# Altium PCB nose_thermo.PcbDoc
Units mil, origin at the board's own origin, x right, y up, seen from the top; angles counter-clockwise.
Board outline 349.57 x 642.49 mil, 2 copper layers (Layer 1 (Top Layer), Layer 4 (Bottom Layer)); 2 components, 4 nets, 8 pads, 4 vias.
Unrouted connection lines stored in the file: 1.
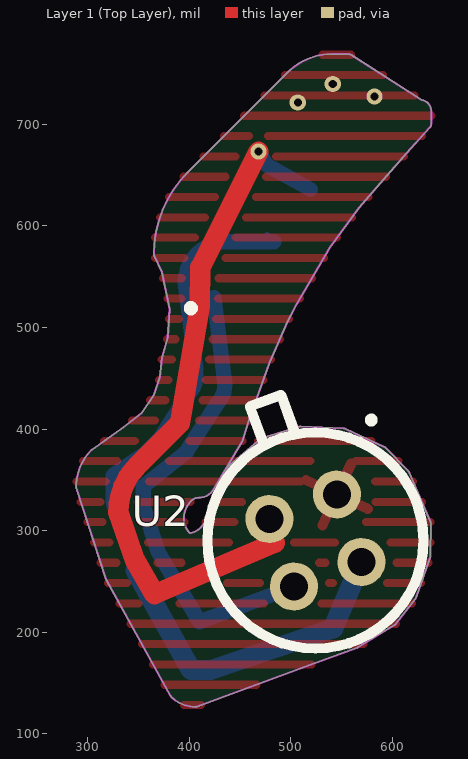
[diagram p0: Layer 1 (Top Layer) view]
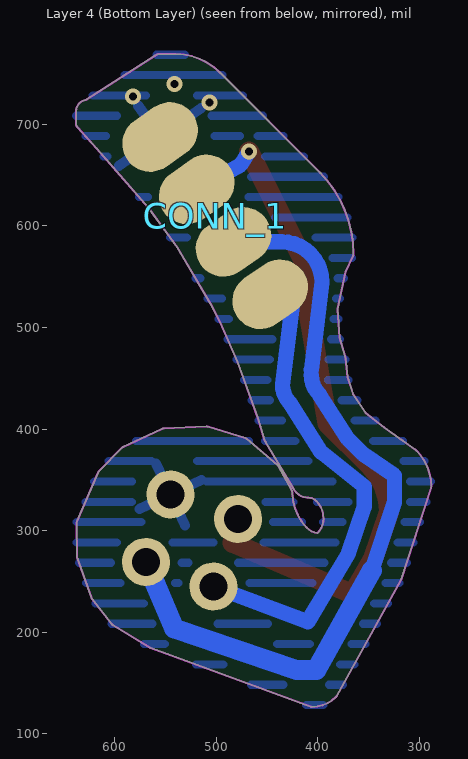
[diagram p1: Layer 4 (Bottom Layer) view, seen from below]

## Layer stack, top to bottom
Top Solder: solder mask 0.4, Solder Resist, Dk 3.5
Layer 1 (Top Layer): signal copper 0.7087
Dielectric 1: dielectric 12.6, FR-4, Dk 4.8
Layer 4 (Bottom Layer): signal copper 0.7087
Bottom Solder: solder mask 0.4, Solder Resist, Dk 3.5

## Board outline
318.28,251.43 cw(c322.66,253.88) 317.89,252.32 317.88,252.34 288.75,341.71 288.75,341.72 288.75,341.71 cw(c293.52,343.28) 288.5,343.28 cw(c338.91,343.28) 303.27,378.92 cw(c306.81,375.38) 303.28,378.94 303.27,378.92 303.5,379.16 cw(c307.05,375.61) 304.15,379.7 316.54,388.57 cw(c319.47,384.5) 316.55,388.58 335.13,401.86 353.03,415.8 365.3,434.18 370.92,451.17 372.92,469.75 cw(c377.9,469.21) 373.09,470.61 373.09,470.62 378.71,489.99 380.64,518.12 372.92,554.61 365.58,570.22 cw(c370.12,572.36) 365.1,572.36 cw(c478.71,572.36) 398.38,652.69 496.79,751.1 cw(c540.03,707.86) 540.03,769.02 556.62,769.02 cw(c556.62,764) 559.33,768.23 628.49,723.99 cw(c626.83,712.86) 638.07,712.86 638.07,700.22 cw(c633.06,700.22) 636.74,696.82 636.76,696.84 636.74,696.82 617.63,675.94 617.67,675.98 617.63,675.94 617.59,675.89 617.63,675.94 594.8,649.75 566.94,617.77 538.45,578.83 505.94,523.43 496.43,505.25 479.01,465.5 458.95,410.11 452.43,388.74 452.42,388.72 452.43,388.74 cw(c447.62,390.18) 451.92,387.6 424.21,341.42 cw(c409.36,349.2) 409.36,332.43 ccw(c409.36,321.72) 401.8,329.31 ccw(c409.36,321.72) 401.78,329.3 ccw(c398.23,332.84) 401.8,329.31 401.78,329.3 ccw(c419.18,311.9) 394.57,311.9 ccw(c414.91,311.9) 400.57,297.48 ccw(c397.3,316.48) 410.93,302.85 ccw(c376.69,337.09) 410.95,302.87 ccw(c376.69,337.09) 425.12,337.09 cw(c430.13,337.09) 425.75,339.53 439.02,363.54 cw(c443.41,361.12) 440.17,364.95 440.18,364.96 470.13,390.34 cw(c473.39,386.53) 471.93,391.33 508.12,402.29 cw(c509.57,397.49) 509.79,402.5 551.76,400.68 cw(c551.55,395.67) 553.67,400.21 553.66,400.21 cw(c551.55,395.67) 553.67,400.21 591.74,382.47 591.75,382.47 ccw(c589.63,377.93) 591.74,382.47 cw(c589.63,377.93) 593.21,381.43 615.4,358.74 cw(c611.81,355.24) 616.42,357.22 637.24,308.84 cw(c632.63,306.86) 637.65,306.86 cw(c632.63,306.86) 637.65,306.8 637.29,275.08 ccw(c632.28,275.14) 637.29,275.14 637.29,275.08 cw(c632.28,275.14) 637,273.46 623.07,234.03 cw(c618.34,235.7) 622.28,232.6 622.29,232.61 cw(c618.34,235.7) 622.28,232.6 602.93,207.98 cw(c598.99,211.07) 602.92,207.97 602.93,207.98 cw(c598.99,211.07) 601.59,206.79 ccw(c598.99,211.07) 601.59,206.79 ccw(c598.99,211.07) 602.92,207.97 601.59,206.79 565.67,184.98 565.67,184.97 ccw(c563.07,189.26) 565.67,184.98 cw(c563.07,189.26) 564.78,184.55 518.92,167.89 518.93,167.89 518.92,167.89 518.91,167.89 518.92,167.89 407.44,126.83 cw(c405.71,131.54) 405.71,126.53 cw(c405.71,159.61) 382.31,136.22 cw(c385.86,139.76) 381.46,137.35

## Design rules (kind name [scope] priority, off if disabled: settings)
Clearance [All] p1: gap=4 ignorepadtopadclearanceinfootprint=FALSE except(0: Arc-Hole Track-Hole SMDPad-Hole THPad-Hole Via-Hole Fill-Hole Poly-Hole Region-Hole Text-Hole)
DiffPairsRouting [All] p1: maxlimit=10 minlimit=10 mostfreqgap=10 toplayer_minwidth=15 toplayer_maxwidth=15 toplayer_prefwidth=15 bottomlayer_minwidth=15 bottomlayer_maxwidth=15 bottomlayer_prefwidth=15 substack1={A9119681-F30E-4965-AEFB-5FD7E99CBF57} toplayer_{a9119681-f30e-4965-aefb-5fd7e99cbf57}_minwidth=15 toplayer_{a9119681-f30e-4965-aefb-5fd7e99cbf57}_maxwidth=15 toplayer_{a9119681-f30e-4965-aefb-5fd7e99cbf57}_prefwidth=15 bottomlayer_{a9119681-f30e-4965-aefb-5fd7e99cbf57}_minwidth=15 bottomlayer_{a9119681-f30e-4965-aefb-5fd7e99cbf57}_maxwidth=15 bottomlayer_{a9119681-f30e-4965-aefb-5fd7e99cbf57}_prefwidth=15 substack2={F6C10761-EC22-4305-87DD-0F5299EFC78A} toplayer_{f6c10761-ec22-4305-87dd-0f5299efc78a}_minwidth=15 toplayer_{f6c10761-ec22-4305-87dd-0f5299efc78a}_maxwidth=15 toplayer_{f6c10761-ec22-4305-87dd-0f5299efc78a}_prefwidth=15 bottomlayer_{f6c10761-ec22-4305-87dd-0f5299efc78a}_minwidth=15 bottomlayer_{f6c10761-ec22-4305-87dd-0f5299efc78a}_maxwidth=15 bottomlayer_{f6c10761-ec22-4305-87dd-0f5299efc78a}_prefwidth=15 maxuncoupledlength=500
PlaneClearance [All] p1: clearance=8
PlaneConnect GND [InNet('GND')] p1: planeconnectstyle=Direct reliefexpansion=20 reliefentries=4 reliefconductorwidth=10 reliefairgap=10
PlaneConnect [All] p2: planeconnectstyle=Direct reliefexpansion=20 reliefentries=4 reliefconductorwidth=10 reliefairgap=10
PolygonConnect GND_1 [InNet('GND')] p1: thpad.connectstyle=Relief thpad.reliefconductorwidth=10 thpad.reliefentries=4 thpad.polygonreliefangle="90 Angle" thpad.airgapwidth=10 smdpad.connectstyle=Relief smdpad.reliefconductorwidth=10 smdpad.reliefentries=4 smdpad.polygonreliefangle="90 Angle" smdpad.airgapwidth=10 via.connectstyle=Direct via.reliefconductorwidth=10 via.reliefentries=4 via.polygonreliefangle="90 Angle" via.airgapwidth=10
PolygonConnect [All] p2: connectstyle=Relief reliefconductorwidth=10 reliefentries=4 polygonreliefangle="90 Angle" airgapwidth=10
RoomDefinition nose_thermo [InComponentClass('nose_thermo')] p1: confinementstyle=ConfineIn formatcopy=TRUE lockcomponents=FALSE outline -3944.1,-5931.64 -1944.1,-5931.64 -1944.1,-4931.64 -3944.1,-4931.64
RoutingCorners [All] p1: cornerstyle=Round minsetback=100 maxsetback=100
RoutingVias [All] p1: holewidth=8 width=16 viastyle="Through Hole" minholewidth=4 minwidth=8 maxholewidth=12 maxwidth=24
SolderMaskExpansion [All] p1: expansion=4 istentingtop=FALSE
Width POWER [InNet('3.3V') or InNet('5V') or InNet('BATTERY_1') or InNet('VBAT')] p1: maxlimit=30 minlimit=4 preferedwidth=8 substack1={A9119681-F30E-4965-AEFB-5FD7E99CBF57} substack2={F6C10761-EC22-4305-87DD-0F5299EFC78A} minimp=50.000000 maximp=50.000000 favimp=50.000000
Width [All] p2: maxlimit=10 minlimit=4 preferedwidth=6 substack1={A9119681-F30E-4965-AEFB-5FD7E99CBF57} substack2={F6C10761-EC22-4305-87DD-0F5299EFC78A} minimp=50.000000 maximp=50.000000 favimp=50.000000
26 further rules are at their usual default settings.

## Components (designator, comment, footprint, x,y, rotation, side; value= is the part's Value field where it differs from the comment)
CONN_1 "THERMO" 4_POS_1MM_HEADER 501.25,610.02 r55 top
U2 "ZTP-135SR" ZTP-135SR 524.02,290.32 r335 top

## Footprints (in the part's own frame and the unit in brackets; to place one, negate y for a bottom-side part, rotate by r counter-clockwise, add the part's x,y. Pads: shape width x height; smd on the part's side, far side on the other; paste and mask are expansions set on the pad)
4_POS_1MM_HEADER [mm]
  oval 1.4x2 smd far side: 1(-2.4,0) 2(-0.8,0) 3(0.8,0) 4(2.4,0)
  silkscreen extent -3.4,0.7 -3.3,0.8
ZTP-135SR [mm]
  round 1.2 hole 0.7: 1(0,1.27) 2(1.27,0) 3(0,-1.27) 4(-1.27,0)
  silkscreen extent -2.9,-2.7 2.7,3.35, body extent -3.24,-2.79 2.74,3.19, height 2.67

## Part data
CONN_1: library part 4_pin_1mm_header
U2: "Undefined or Miscellaneous", Manufacturer_Name="Amphenol Advanced Sensors", Mouser Part Number=527-ZTP-135SR, Allied_Number=70282698, Allied Price/Stock=https://www.alliedelec.com/amphenol-advanced-sensors-ztp-135sr/70282698/, Datasheet Link=https://www.amphenol-sensors.com/en/component/edocman/370-thermopile-ir-sensor-applications/download?Itemid=7967, Manufacturer_Part_Number=ZTP-135SR, Mouser Price/Stock=https://www.mouser.com/Search/Refine.aspx?Keyword=527-ZTP-135SR

## Via types
v1: diameter 16, hole 8, Layer 1 (Top Layer) to Layer 4 (Bottom Layer), tented both sides, 4 vias

## Nets (pads, with @x,y where several pads share a name; then routed paths per layer and width w, separated by ;. In a path a pad name is that pad's centre, name@x,y a point inside that pad or via, vN(x,y) a via of type N, cw(c..) or ccw(c..) an arc to the next point about the centre after c; other vN are vias at no path point)
GND: CONN_1.4 U2.1
  other v1: 506.75,721.36 582.15,727.21 541.15,739.66
TP_NOSE: CONN_1.3 U2.4 | length 712.8
  Layer 1 (Top Layer) w6: U2.4 484.2,288.2
  Layer 1 (Top Layer) w15: 386.97,402.14 ccw(c374.44,414.67) 391.17,408.84 ccw(c374.44,414.67) 392.16,414.67
  Layer 1 (Top Layer) w20: v1(467.95,673.04) 410.79,559.22 410.23,521.39 392.16,414.67 391.17,408.84 390.67,405.84 349.22,364.39 ccw(c395.48,318.12) 330.05,318.12 346.43,270.69 365.62,237.38 484.2,288.2
  Layer 4 (Bottom Layer) w15: v1(467.95,673.04) 475.77,660.24 CONN_1.3
TP_NOSE_GND: CONN_1.2 U2.2 | length 787.7
  Layer 4 (Bottom Layer) w6: 363.91,384.1 ccw(c363.91,385.65) 365,384.56 ; 406.53,452.83 406.53,458.44 ; CONN_1.2@476.41,590.99 CONN_1.2 ; U2.2@554.75,269.18 U2.2
  Layer 4 (Bottom Layer) w15: 347.08,260.83 324.82,327.4 324.82,354.22 355.8,375.35 370.53,390.08 398.87,434.33 ccw(c380.37,452.83) 406.53,452.83 ; 406.53,458.44 395.96,544.44 cw(c435.74,544.44) 435.74,584.21 CONN_1.2 ; 427.21,425.06 ccw(c408.71,443.56) 428.23,426.14 428.5,426.57
  Layer 4 (Bottom Layer) w20: 347.08,260.83 401.73,162.89 421.07,162.89 541.45,203.74 U2.2
TP_THERMISTOR: CONN_1.1 U2.3 | length 463.6
  Layer 4 (Bottom Layer) w15: CONN_1.1@424.3,529.56 434.87,443.56 cw(c408.71,443.56) 428.23,426.14 396.85,377.15 354.57,343.23 354.57,323.62 370.01,277.45 410.04,210.33 U2.3
copper on no net: | length 1.6
  Layer 4 (Bottom Layer) w6: -2451.26,365.58 cw(c-2452.71,364.12) -2450.65,364.12

## Polygon pours and split planes (outlines as drawn)
GND on Layer 4 (Bottom Layer) "Layer 1 (Top Layer)-No Net" (hatched Horizontal grid 20 track 8, pour order 20): 318.28,251.43 cw(c322.66,253.88) 317.89,252.32 317.88,252.34 288.75,341.71 288.75,341.72 288.75,341.71 cw(c293.52,343.28) 288.5,343.28 cw(c338.91,343.28) 303.27,378.92 cw(c306.81,375.38) 303.28,378.94 303.27,378.92 303.5,379.16 cw(c307.05,375.61) 304.15,379.7 316.54,388.57 cw(c319.47,384.5) 316.55,388.58 335.13,401.86 353.03,415.8 365.3,434.18 370.92,451.17 372.92,469.75 cw(c377.9,469.21) 373.09,470.61 373.09,470.62 378.71,489.99 380.64,518.12 372.92,554.61 365.58,570.22 cw(c370.12,572.36) 365.1,572.36 cw(c478.71,572.36) 398.38,652.69 496.79,751.1 cw(c540.03,707.86) 540.03,769.02 556.62,769.02 cw(c556.62,764) 559.33,768.23 628.49,723.99 cw(c626.83,712.86) 638.07,712.86 638.07,700.22 cw(c633.06,700.22) 636.74,696.82 636.76,696.84 636.74,696.82 617.63,675.94 617.67,675.98 617.63,675.94 617.59,675.89 617.63,675.94 594.8,649.75 566.94,617.77 538.45,578.83 505.94,523.43 496.43,505.25 479.01,465.5 458.95,410.11 452.43,388.74 452.42,388.72 452.43,388.74 cw(c447.62,390.18) 451.92,387.6 424.21,341.42 cw(c409.36,349.2) 409.36,332.43 ccw(c409.36,321.72) 401.8,329.31 ccw(c409.36,321.72) 401.78,329.3 ccw(c398.23,332.84) 401.8,329.31 401.78,329.3 ccw(c419.18,311.9) 394.57,311.9 ccw(c414.91,311.9) 400.57,297.48 ccw(c397.3,316.48) 410.93,302.85 ccw(c376.69,337.09) 410.95,302.87 ccw(c376.69,337.09) 425.12,337.09 cw(c430.13,337.09) 425.75,339.53 439.02,363.54 cw(c443.41,361.12) 440.17,364.95 440.18,364.96 470.13,390.34 cw(c473.39,386.53) 471.93,391.33 508.12,402.29 cw(c509.57,397.49) 509.79,402.5 551.76,400.68 cw(c551.55,395.67) 553.67,400.21 553.66,400.21 cw(c551.55,395.67) 553.67,400.21 591.74,382.47 591.75,382.47 ccw(c589.63,377.93) 591.74,382.47 cw(c589.63,377.93) 593.21,381.43 615.4,358.74 cw(c611.81,355.24) 616.42,357.22 637.24,308.84 cw(c632.63,306.86) 637.65,306.86 cw(c632.63,306.86) 637.65,306.8 637.29,275.08 ccw(c632.28,275.14) 637.29,275.14 637.29,275.08 cw(c632.28,275.14) 637,273.46 623.07,234.03 cw(c618.34,235.7) 622.28,232.6 622.29,232.61 cw(c618.34,235.7) 622.28,232.6 602.93,207.98 cw(c598.99,211.07) 602.92,207.97 602.93,207.98 cw(c598.99,211.07) 601.59,206.79 ccw(c598.99,211.07) 601.59,206.79 ccw(c598.99,211.07) 602.92,207.97 601.59,206.79 565.67,184.98 565.67,184.97 ccw(c563.07,189.26) 565.67,184.98 cw(c563.07,189.26) 564.78,184.55 518.92,167.89 518.93,167.89 518.92,167.89 518.91,167.89 518.92,167.89 407.44,126.83 cw(c405.71,131.54) 405.71,126.53 cw(c405.71,159.61) 382.31,136.22 cw(c385.86,139.76) 381.46,137.35
GND on Layer 1 (Top Layer) "Layer 1 (Top Layer)-No Net1" (hatched Horizontal grid 20 track 8, pour order 21): 318.28,251.43 cw(c322.66,253.88) 317.89,252.32 317.88,252.34 288.75,341.71 288.75,341.72 288.75,341.71 cw(c293.52,343.28) 288.5,343.28 cw(c338.91,343.28) 303.27,378.92 cw(c306.81,375.38) 303.28,378.94 303.27,378.92 303.5,379.16 cw(c307.05,375.61) 304.15,379.7 316.54,388.57 cw(c319.47,384.5) 316.55,388.58 335.13,401.86 353.03,415.8 365.3,434.18 370.92,451.17 372.92,469.75 cw(c377.9,469.21) 373.09,470.61 373.09,470.62 378.71,489.99 380.64,518.12 372.92,554.61 365.58,570.22 cw(c370.12,572.36) 365.1,572.36 cw(c478.71,572.36) 398.38,652.69 496.79,751.1 cw(c540.03,707.86) 540.03,769.02 556.62,769.02 cw(c556.62,764) 559.33,768.23 628.49,723.99 cw(c626.83,712.86) 638.07,712.86 638.07,700.22 cw(c633.06,700.22) 636.74,696.82 636.76,696.84 636.74,696.82 617.63,675.94 617.67,675.98 617.63,675.94 617.59,675.89 617.63,675.94 594.8,649.75 566.94,617.77 538.45,578.83 505.94,523.43 496.43,505.25 479.01,465.5 458.95,410.11 452.43,388.74 452.42,388.72 452.43,388.74 cw(c447.62,390.18) 451.92,387.6 424.21,341.42 cw(c409.36,349.2) 409.36,332.43 ccw(c409.36,321.72) 401.8,329.31 ccw(c409.36,321.72) 401.78,329.3 ccw(c398.23,332.84) 401.8,329.31 401.78,329.3 ccw(c419.18,311.9) 394.57,311.9 ccw(c414.91,311.9) 400.57,297.48 ccw(c397.3,316.48) 410.93,302.85 ccw(c376.69,337.09) 410.95,302.87 ccw(c376.69,337.09) 425.12,337.09 cw(c430.13,337.09) 425.75,339.53 439.02,363.54 cw(c443.41,361.12) 440.17,364.95 440.18,364.96 470.13,390.34 cw(c473.39,386.53) 471.93,391.33 508.12,402.29 cw(c509.57,397.49) 509.79,402.5 551.76,400.68 cw(c551.55,395.67) 553.67,400.21 553.66,400.21 cw(c551.55,395.67) 553.67,400.21 591.74,382.47 591.75,382.47 ccw(c589.63,377.93) 591.74,382.47 cw(c589.63,377.93) 593.21,381.43 615.4,358.74 cw(c611.81,355.24) 616.42,357.22 637.24,308.84 cw(c632.63,306.86) 637.65,306.86 cw(c632.63,306.86) 637.65,306.8 637.29,275.08 ccw(c632.28,275.14) 637.29,275.14 637.29,275.08 cw(c632.28,275.14) 637,273.46 623.07,234.03 cw(c618.34,235.7) 622.28,232.6 622.29,232.61 cw(c618.34,235.7) 622.28,232.6 602.93,207.98 cw(c598.99,211.07) 602.92,207.97 602.93,207.98 cw(c598.99,211.07) 601.59,206.79 ccw(c598.99,211.07) 601.59,206.79 ccw(c598.99,211.07) 602.92,207.97 601.59,206.79 565.67,184.98 565.67,184.97 ccw(c563.07,189.26) 565.67,184.98 cw(c563.07,189.26) 564.78,184.55 518.92,167.89 518.93,167.89 518.92,167.89 518.91,167.89 518.92,167.89 407.44,126.83 cw(c405.71,131.54) 405.71,126.53 cw(c405.71,159.61) 382.31,136.22 cw(c385.86,139.76) 381.46,137.35

## Keep-outs
Keep-Out Layer:
  lines w2: 288.75,341.71 cw(c293.52,343.28) 288.5,343.28 cw(c338.91,343.28) 303.27,378.92 ; 288.75,341.72 288.75,341.71 ; 288.75,341.72 288.75,341.71 ; 288.75,341.71 317.88,252.34 317.89,252.32 ccw(c322.66,253.88) 318.28,251.43 381.46,137.35 ccw(c385.86,139.76) 382.31,136.22 ccw(c405.71,159.61) 405.71,126.53 ccw(c405.71,131.54) 407.44,126.83 518.92,167.89 ; 303.27,378.92 cw(c306.81,375.38) 303.28,378.94 303.27,378.92 ; 303.27,378.92 303.5,379.16 cw(c307.05,375.61) 304.15,379.7 316.54,388.57 ; 303.27,378.92 303.27,378.92 ; 316.55,388.58 ccw(c319.47,384.5) 316.54,388.57 ; 316.55,388.58 335.13,401.86 353.03,415.8 365.3,434.18 370.92,451.17 372.92,469.75 cw(c377.9,469.21) 373.09,470.61 ; 373.09,470.62 378.71,489.99 380.64,518.12 372.92,554.61 365.58,570.22 cw(c370.12,572.36) 365.1,572.36 cw(c478.71,572.36) 398.38,652.69 496.79,751.1 cw(c540.03,707.86) 540.03,769.02 556.62,769.02 cw(c556.62,764) 559.33,768.23 628.49,723.99 cw(c626.83,712.86) 638.07,712.86 638.07,700.22 cw(c633.06,700.22) 636.74,696.82 ; 373.09,470.61 373.09,470.62 ; 400.57,297.48 ccw(c397.3,316.48) 410.93,302.85 ; 400.57,297.48 cw(c414.91,311.9) 394.57,311.9 cw(c419.18,311.9) 401.78,329.3 ; 400.57,297.48 400.57,297.48 ; 401.78,329.3 ccw(c398.23,332.84) 401.8,329.31 ; 401.8,329.31 ccw(c409.36,321.72) 401.78,329.3 ; 401.8,329.31 cw(c409.36,321.72) 409.36,332.43 ccw(c409.36,349.2) 424.21,341.42 451.92,387.6 ccw(c447.62,390.18) 452.43,388.74 ; 401.78,329.3 401.8,329.31 ; 410.95,302.87 ccw(c376.69,337.09) 425.12,337.09 cw(c430.13,337.09) 425.75,339.53 439.02,363.54 cw(c443.41,361.12) 440.17,364.95 440.18,364.96 470.13,390.34 cw(c473.39,386.53) 471.93,391.33 508.12,402.29 cw(c509.57,397.49) 509.79,402.5 551.76,400.68 cw(c551.55,395.67) 553.67,400.21 ; 410.93,302.85 ccw(c376.69,337.09) 410.95,302.87 ; 452.43,388.74 452.42,388.72 452.43,388.74 ; 452.43,388.74 458.95,410.11 479.01,465.5 496.43,505.25 505.94,523.43 538.45,578.83 566.94,617.77 594.8,649.75 617.63,675.94 ; 518.92,167.89 518.91,167.89 518.92,167.89 ; 518.92,167.89 518.93,167.89 ; 518.92,167.89 518.93,167.89 ; 518.92,167.89 564.78,184.55 ccw(c563.07,189.26) 565.67,184.98 ; 553.67,400.21 ccw(c551.55,395.67) 553.66,400.21 ; 553.67,400.21 591.74,382.47 ; 553.66,400.21 553.67,400.21 ; 565.67,184.97 ccw(c563.07,189.26) 565.67,184.98 ; 565.67,184.98 565.67,184.98 ; 565.67,184.97 565.67,184.98 ; 565.67,184.98 601.59,206.79 ; 591.74,382.47 cw(c589.63,377.93) 593.21,381.43 615.4,358.74 cw(c611.81,355.24) 616.42,357.22 637.24,308.84 cw(c632.63,306.86) 637.65,306.86 cw(c632.63,306.86) 637.65,306.8 637.29,275.08 ; 591.75,382.47 ccw(c589.63,377.93) 591.74,382.47 ; 591.74,382.47 591.74,382.47 ; 591.74,382.47 591.75,382.47 ; 591.74,382.47 591.74,382.47 ; 601.59,206.79 ccw(c598.99,211.07) 602.92,207.97 ; 601.59,206.79 ccw(c598.99,211.07) 601.59,206.79 ; 601.59,206.79 ccw(c598.99,211.07) 602.93,207.98 ; 601.59,206.79 602.92,207.97 ; 601.59,206.79 601.59,206.79 ; 601.59,206.79 601.59,206.79 ; 602.92,207.97 ccw(c598.99,211.07) 602.93,207.98 ; 602.93,207.98 602.93,207.98 ; 602.93,207.98 602.93,207.98 ; 602.92,207.97 602.93,207.98 ; 602.93,207.98 622.28,232.6 ; 617.63,675.94 617.59,675.89 617.63,675.94 ; 617.63,675.94 617.67,675.98 617.63,675.94 ; 617.63,675.94 636.74,696.82 ; 622.28,232.6 ccw(c618.34,235.7) 622.29,232.61 ; 622.28,232.6 ccw(c618.34,235.7) 623.07,234.03 637,273.46 ccw(c632.28,275.14) 637.29,275.08 ; 622.28,232.6 622.28,232.6 ; 622.28,232.6 622.28,232.6 ; 622.28,232.6 622.29,232.61 ; 636.74,696.82 636.76,696.84 636.74,696.82 ; 637.29,275.08 ccw(c632.28,275.14) 637.29,275.14 637.29,275.08

## Silkscreen, mask and mechanical layers (free items; w line width, h text height)
Stiffener:
  lines w2: 298.41,342.6 cw(c331.48,342.6) 308.1,365.98 362.57,414.68 404.38,340.44 383.57,320.85 452.67,149.41 414.47,135.72 413.95,135.72 cw(c413.95,184.94) 379.15,150.14 326.53,253.22 298.41,342.6
Mechanical 15:
  lines w10: 398.44,292.21 ccw(c397.3,316.48) 414.48,299.3 ccw(c376.69,337.09) 430.13,337.09 443.41,361.12 473.39,386.53 509.57,397.49 551.55,395.67 589.63,377.93 611.81,355.24 632.63,306.86 632.28,275.14 618.34,235.7 598.99,211.07 563.07,189.26 517.2,172.6 405.71,131.54 cw(c405.71,159.61) 385.86,139.76 322.66,253.88 293.52,343.28 cw(c338.91,343.28) 306.81,375.38 307.05,375.61 319.47,384.5 338.13,397.84 356.76,412.34 369.85,431.96 375.85,450.1 377.9,469.21 383.68,489.11 385.69,518.47 377.71,556.22 370.12,572.36 cw(c478.71,572.36) 401.92,649.15 500.33,747.56 cw(c540.03,707.86) 540.03,764 556.62,764 626.83,719.1 cw(c626.83,712.86) 633.06,712.86 633.06,700.22 613.89,679.28 591.02,653.04 563.02,620.9 534.25,581.58 501.55,525.86 491.91,507.43 474.35,467.36 454.19,411.7 447.62,390.18 419.83,343.86 cw(c409.36,349.2) 409.36,337.45 ccw(c409.36,321.72) 398.23,332.84 ccw(c419.18,311.9) 389.56,311.9 ccw(c414.91,311.9) 398.65,292.45